# Altium PCB ADC_broad.PcbDoc
Units mil, origin at the board's own origin, x right, y up, seen from the top; angles counter-clockwise.
Board outline 6000 x 4000 mil, 2 copper layers (Top Layer, Bottom Layer); 79 components, 81 nets, 290 pads, 27 vias.
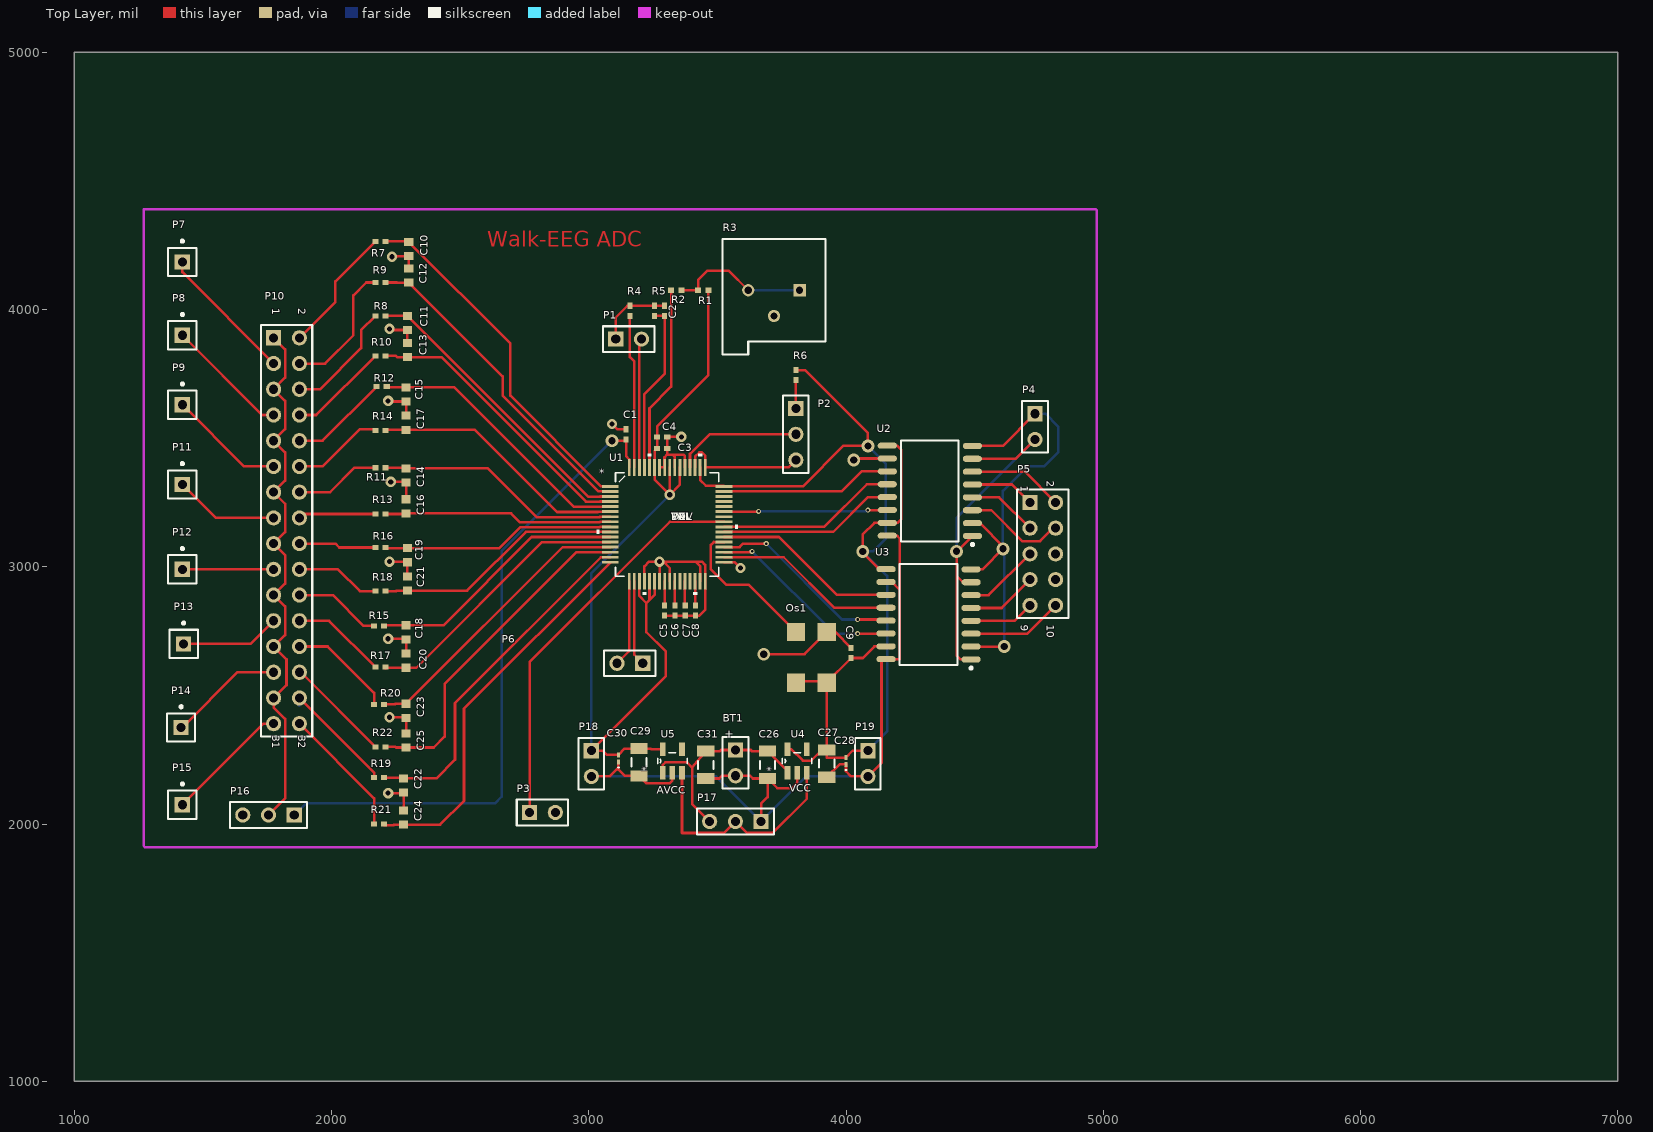
[diagram p0: Top Layer view]
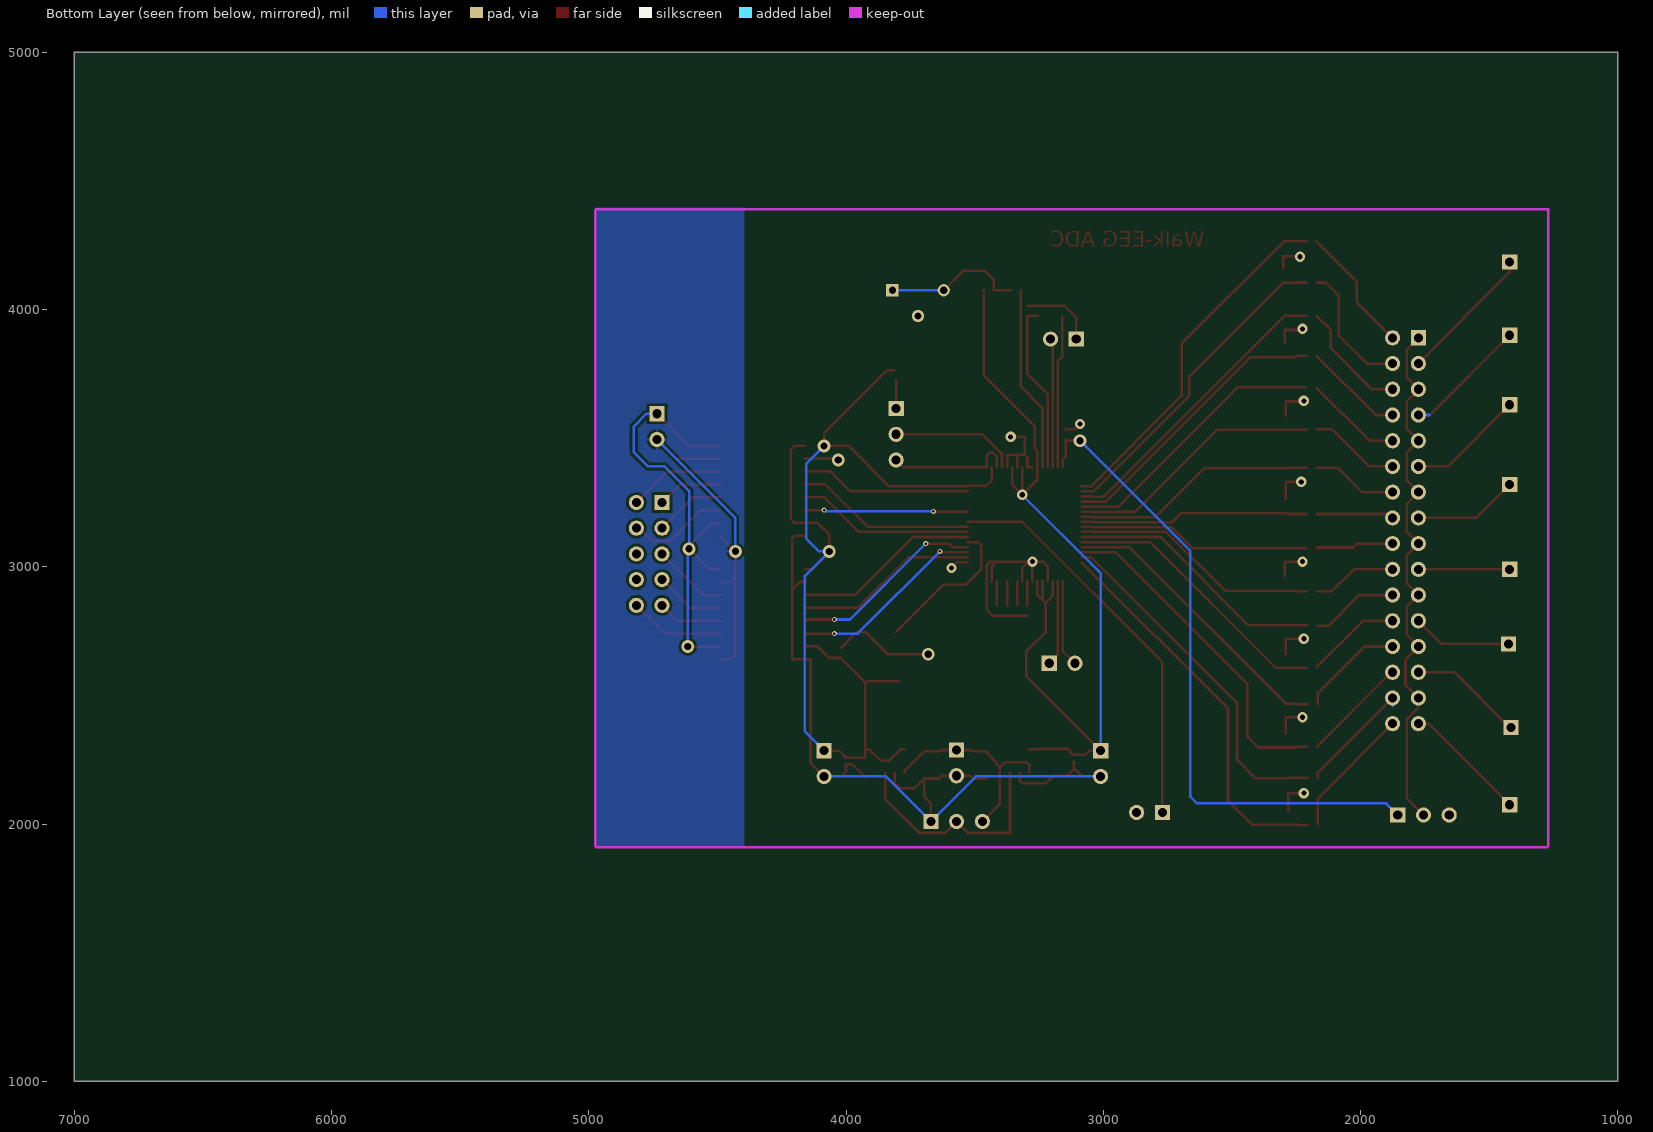
[diagram p1: Bottom Layer view, seen from below]

## Layer stack, top to bottom
Top Layer: signal copper 1.4
Dielectric: dielectric 12.6, FR-4, Dk 4.8
Bottom Layer: signal copper 1.4

## Board outline
1000,1000 7000,1000 7000,5000 1000,5000

## Design rules (kind name [scope] priority, off if disabled: settings)
Clearance [All] p1: gap=10
PolygonConnect [All] p1: connectstyle=Relief reliefconductorwidth=10 reliefentries=4 polygonreliefangle="90 Angle" airgapwidth=10
RoutingVias [All] p1: holewidth=28 width=50 viastyle="Through Hole" minholewidth=28 minwidth=50 maxholewidth=28 maxwidth=50
SilkscreenOverComponentPads [All] p1: minsilkscreentomaskgap=10
SolderMaskExpansion [All] p1: expansion=4
Width [All] p1: maxlimit=10 minlimit=10 preferedwidth=10
27 further rules are at their usual default settings.

## Classes and differential pairs
component class PW: BT1 C26 C27 C28 C29 C30 C31 P17 P18 P19 U4 U5
component class On_board_front_end: C10 C11 C12 C13 C14 C15 C16 C17 C18 C19 C20 C21 C22 C23 C24 C25 P7 P8 P9 P10 P11 P12 P13 P14 P15 P16 R7 R8 R9 R10 R11 R12 R13 R14 R15 R16 R17 R18 R19 R20 R21 R22
component class isolation: P4 P5 P6 U2
component class ADC: C1 C2 C3 C4 C5 C6 C7 C8 C9 Os1 P1 P2 P3 R1 R2 R3 R4 R5 R6 U1

## Components (designator, comment, footprint, x,y, rotation, side; value= is the part's Value field where it differs from the comment)
BT1 "Battery" BAT-2 3570.63,2237.56 r270 top
C1 "Cap" 0402 3145,3515 r270 top
C2 "" 0402 3295,3995 r270 top
C3 "Cap" 0402 3285.31,3460 r0 top
C4 "Cap" 0402 3285.31,3505 r0 top
C5 "Cap" 0402 3295,2830 r270 top
C6 "Cap" 0402 3335,2830 r270 top
C7 "Cap" 0402 3375,2830 r270 top
C8 "Cap" 0402 3415,2830 r270 top
C9 "Cap" 0402 4020,2665 r90 top
C10 "Cap" 1608[0603] 2300,4235 r270 top
C11 "Cap" 1608[0603] 2295,3947.87 r270 top
C12 "Cap" 1608[0603] 2300,4132.44 r270 top
C13 "Cap" 1608[0603] 2295,3842.87 r270 top
C14 "Cap" 1608[0603] 2290,3355 r270 top
C15 "Cap" 1608[0603] 2290,3670 r270 top
C16 "Cap" 1608[0603] 2290,3235 r270 top
C17 "Cap" 1608[0603] 2290,3560 r270 top
C18 "Cap" 1608[0603] 2290,2745 r270 top
C19 "Cap" 1608[0603] 2295,3045 r270 top
C20 "Cap" 1608[0603] 2290,2635 r270 top
C21 "Cap" 1608[0603] 2295,2935 r270 top
C22 "Cap" 1608[0603] 2280,2150 r270 top
C23 "Cap" 1608[0603] 2290,2440 r270 top
C24 "Cap" 1608[0603] 2280,2025 r270 top
C25 "Cap" 1608[0603] 2290,2325 r270 top
C26 "10u" C1206 3695,2230 r270 top
C27 "10u" C1206 3925,2235 r270 top
C28 "Cap" 0603 4000,2245 r90 top
C29 "10u" C1206 3195,2240 r270 top
C30 "Cap" 0603 3115,2255 r90 top
C31 "10u" C1206 3455,2230 r270 top
Os1 "FXO-HC73" PCBComponent_1 -24635,23320 r90 top
P1 "Header 2" HDR1X2 3105,3885 r0 top
P2 "Header 3" HDR1X3 3805,3615 r270 top
P3 "Header 2" HDR1X2 2770,2045 r0 top
P4 "Header 2" HDR1X2 4735,3595 r270 top
P5 "Header 5X2" HDR2X5 4715,3250 r270 top
P6 "Header 2" HDR1X2 3210,2625 r180 top
P7 "Plug" PIN1 1420,4185 r0 top
P8 "Plug" PIN1 1420,3900 r0 top
P9 "Plug" PIN1 1420,3630 r0 top
P10 "Header 16X2" HDR2X16 1775,3890 r270 top
P11 "Plug" PIN1 1420,3320 r0 top
P12 "Plug" PIN1 1420,2990 r0 top
P13 "Plug" PIN1 1425,2700 r0 top
P14 "Plug" PIN1 1415,2375 r0 top
P15 "Plug" PIN1 1420,2075 r0 top
P16 "Header 3" HDR1X3 1855,2035 r180 top
P17 "Header 3" HDR1X3 3670,2010 r180 top
P18 "Header 2" HDR1X2 3010,2285 r270 top
P19 "Header 2" HDR1X2 4085,2285 r270 top
R1 "" 0402 3445,4075 r0 top
R2 "" 0402 3340,4075 r180 top
R3 "Res Tap" VR4 3720,4025 r180 top
R4 "" 0402 3160,3995 r270 top
R5 "" 0402 3255,3995 r90 top
R6 "" 0402 3805,3745 r90 top
R7 "" 0402 2190,4265 r0 top
R8 "" 0402 2190,3975 r0 top
R9 "" 0402 2190,4105 r0 top
R10 "" 0402 2190,3820 r0 top
R11 "" 0402 2190,3385 r0 top
R12 "" 0402 2195,3700 r0 top
R13 "" 0402 2190,3205 r0 top
R14 "" 0402 2190,3530 r0 top
R15 "" 0402 2185,2770 r0 top
R16 "" 0402 2190,3075 r0 top
R17 "" 0402 2190,2610 r0 top
R18 "" 0402 2190,2905 r0 top
R19 "" 0402 2185,2180 r0 top
R20 "" 0402 2185,2465 r0 top
R21 "" 0402 2185,2000 r0 top
R22 "" 0402 2190,2300 r0 top
U1 "ADS1298_PAG_64" PAG64 3305,3165 r0 top
U2 "ADUM1401" SOIC_W 4190,3065 r180 top
U3 "ADUM1402" SOIC_W 4185,2585 r180 top
U4 "ADP151AUJZ-1.5-R" UJ_5 3810,2245 r90 top
U5 "ADP151AUJZ-1.5-R" UJ_5 3325,2245 r90 top

## Footprints (in the part's own frame and the unit in brackets; to place one, negate y for a bottom-side part, rotate by r counter-clockwise, add the part's x,y. Pads: shape width x height; smd on the part's side, far side on the other; paste and mask are expansions set on the pad)
0402 [mm] "Chip Capacitor, Body 1.0x0.5mm, IPC High Density"
  rect 0.6x0.5 smd: 1(-0.5,0) 2(0.5,0)
  body extent -0.55,-0.3 0.55,0.3, height 1.3
0603 [mm] "Chip Inductor, Body 0.6x0.3mm, IPC High Density"
  rect 0.5x0.3 smd: 1(-0.35,0) 2(0.35,0)
  silkscreen extent -0.9,-0.05 -0.9,0.05, body extent -0.33,-0.18 0.33,0.18, height 0.55
1608[0603] [mm] "Chip Capacitor, Body 1.6x0.8mm, IPC High Density"
  rect 0.8x0.9 smd: 1(-0.7,0) 2(0.7,0)
  body extent -0.87,-0.48 0.87,0.48, height 1.3
BAT-2 [mm] "Battery; 2 Leads"
  rect 1.5x1.5 hole 0.9: 1(-1.27,0)
  round 1.5 hole 0.9: 2(1.27,0)
  silkscreen extent -2.54,-1.27 2.54,1.27
C1206 [mm] "Chip Capacitor, Body 3.2x1.6mm, IPC High Density"
  rect 1.1x1.7 smd: 1(-1.35,0) 2(1.35,0)
  silkscreen extent -0.4,-0.75 0.4,0.75, body extent -1.7,-0.9 1.7,0.9, height 1.3
HDR1X2 [mm] "Connector; Header; 2 Position"
  rect 1.5x1.5 hole 0.9: 1(0,0)
  round 1.5 hole 0.9: 2(2.54,0)
  silkscreen extent -1.27,-1.27 3.81,1.27
HDR1X3 [mm] "Connector; Header; 3 Position"
  rect 1.5x1.5 hole 0.9: 1(0,0)
  round 1.5 hole 0.9: 2(2.54,0) 3(5.08,0)
  silkscreen extent -1.27,-1.27 6.35,1.27
HDR2X5 [mm] "Connector; Header; 5x2 Position"
  rect 1.5x1.5 hole 0.9: 1(0,0)
  round 1.5 hole 0.9: 2(0,2.54) 3(2.54,0) 4(2.54,2.54) 5(5.08,0) 6(5.08,2.54) 7(7.62,0) 8(7.62,2.54) 9(10.16,0) 10(10.16,2.54)
  silkscreen extent -1.27,-1.27 11.43,3.81
HDR2X16 [mm] "Connector; Header; 16x2 Position"
  rect 1.5x1.5 hole 0.9: 1(0,0)
  round 1.5 hole 0.9: 2(0,2.54) 3(2.54,0) 4(2.54,2.54) 5(5.08,0) 6(5.08,2.54) 7(7.62,0) 8(7.62,2.54) 9(10.16,0) 10(10.16,2.54) 11(12.7,0) 12(12.7,2.54) 13(15.24,0) 14(15.24,2.54) 15(17.78,0) 16(17.78,2.54) 17(20.32,0) 18(20.32,2.54) 19(22.86,0) 20(22.86,2.54) 21(25.4,0) 22(25.4,2.54) 23(27.94,0) 24(27.94,2.54) 25(30.48,0) 26(30.48,2.54) 27(33.02,0) 28(33.02,2.54) 29(35.56,0) 30(35.56,2.54) 31(38.1,0) 32(38.1,2.54)
  silkscreen extent -1.27,-1.27 39.37,3.81
PAG64 [mil]
  rect 65.5x11 smd: 1(-221.25,147.64) 2(-221.25,127.95) 3(-221.25,108.27) 4(-221.25,88.58) 5(-221.25,68.9) 6(-221.25,49.21) 7(-221.25,29.53) 8(-221.25,9.84) 9(-221.25,-9.84) 10(-221.25,-29.53) 11(-221.25,-49.21) 12(-221.25,-68.9) 13(-221.25,-88.58) 14(-221.25,-108.27) 15(-221.25,-127.95) 16(-221.25,-147.64) 33(221.25,-147.64) 34(221.25,-127.95) 35(221.25,-108.27) 36(221.25,-88.58) 37(221.25,-68.9) 38(221.25,-49.21) 39(221.25,-29.53) 40(221.25,-9.84) 41(221.25,9.84) 42(221.25,29.53) 43(221.25,49.21) 44(221.25,68.9) 45(221.25,88.58) 46(221.25,108.27) 47(221.25,127.95) 48(221.25,147.64)
  rect 11x65.5 smd: 17(-147.64,-221.25) 18(-127.95,-221.25) 19(-108.27,-221.25) 20(-88.58,-221.25) 21(-68.9,-221.25) 22(-49.21,-221.25) 23(-29.53,-221.25) 24(-9.84,-221.25) 25(9.84,-221.25) 26(29.53,-221.25) 27(49.21,-221.25) 28(68.9,-221.25) 29(88.58,-221.25) 30(108.27,-221.25) 31(127.95,-221.25) 32(147.64,-221.25) 49(147.64,221.25) 50(127.95,221.25) 51(108.27,221.25) 52(88.58,221.25) 53(68.9,221.25) 54(49.21,221.25) 55(29.53,221.25) 56(9.84,221.25) 57(-9.84,221.25) 58(-29.53,221.25) 59(-49.21,221.25) 60(-68.9,221.25) 61(-88.58,221.25) 62(-108.27,221.25) 63(-127.95,221.25) 64(-147.64,221.25)
  silkscreen extent -274,-274 274,274
PCBComponent_1 [mm]
  rect 1.8x1.8 smd: 1(-527.575,-725.425) 2(-522.575,-725.425) 3(-522.575,-722.4) 4(-527.575,-722.4)
PIN1 [mm] "Connector; Plug"
  rect 1.5x1.5 hole 0.9: 1(0,0)
  silkscreen extent -1.4,-1.4 1.4,2.17
SOIC_W [mm]
  oval 1.9x0.6 smd: 1(-7.654,-1.391) 2(-7.654,-2.661) 3(-7.654,-3.931) 4(-7.654,-5.201) 5(-7.654,-6.471) 6(-7.654,-7.741) 7(-7.654,-9.011) 8(-7.654,-10.281) 9(0.746,-10.306) 10(0.746,-9.036) 11(0.746,-7.766) 12(0.746,-6.496) 13(0.746,-5.226) 14(0.746,-3.956) 15(0.746,-2.686) 16(0.746,-1.416)
  silkscreen extent -7.78,-10.84 -0.6,-0.42, body extent -5.35,-10.85 -1.35,-0.85, height 1.91
UJ_5 [mil]
  rect 52x22 smd: 1(-46,37.4) 2(-46,0) 3(-46,-37.4) 4(46,-37.4) 5(46,37.4)
  silkscreen extent -10,-57 32,57
VR4 [mm] "Thru-Hole; 3 Leads"
  rect 1.2x1.2 hole 0.7: 1(-2.54,-1.27)
  round 1.2 hole 0.7: 2(0,1.27) 3(2.54,-1.27)
  silkscreen extent -5.08,-6.35 5.08,5.08

## Part data
BT1: "Multicell Battery"
C1 C3 C4 C5 C6 C7 C8 C9 C10 C11 C12 C13 C14 C15 C16 C17 C18 C19 C20 C21 C22 C23 C24 C25 C28 C30: "Capacitor"
C2: library part "Cap Semi", "Capacitor (Semiconductor SIM Model)"
C26 C27 C29 C31: library part "CAPACITOR POL", "Capacitor"
P1 P3 P4 P6 P18 P19: "Header, 2-Pin"
P2 P16 P17: "Header, 3-Pin"
P5: "Header, 5-Pin, Dual row"
P10: "Header, 16-Pin, Dual row"
R1 R2 R4 R5 R6 R7 R8 R9 R10 R11 R12 R13 R14 R15 R16 R17 R18 R19 R20 R21 R22: library part Res3, "Resistor"
R3: "Tapped Resistor"
U1 U4 U5: "Imported"
U2: "ADI isolation"

## Via types
v1: diameter 40, hole 20, Top Layer to Bottom Layer, 13 vias
v2: diameter 50, hole 28, Top Layer to Bottom Layer, 8 vias
v3: diameter 20, hole 10, Top Layer to Bottom Layer, 6 vias

## Nets (pads, with @x,y where several pads share a name; then routed paths per layer and width w, separated by ;. In a path a pad name is that pad's centre, name@x,y a point inside that pad or via, vN(x,y) a via of type N, cw(c..) or ccw(c..) an arc to the next point about the centre after c; other vN are vias at no path point)
AGND: BT1.2 C1.1 C3.2 C4.2 C5.2 C6.2 C7.2 C8.2 C9.2 C10.2 C11.2 C12.1 C13.1 C14.2 C15.2 C16.1 C17.1 C18.2 C19.2 C20.1 C21.1 C22.2 C23.2 C24.1 C25.1 C26.2 C27.2 C28.1 C29.2 C30.1 C31.2 Os1.2 P2.3 P3.2 P16.3 P17.1 P18.2 P19.2 R3.2 U1.20 U1.23 U1.25 U1.31 U1.32 U1.33 U1.49 U1.51 U1.53 U1.55 U1.57 U1.58 U2.10 U2.16 U3.10 U3.16 U4.2 U5.2 | length 7013.4
  Top Layer w10: v1(2220,2120) 2277.56,2120 C22.2 C24.1 ; v1(2220,2720) 2287.44,2720 C18.2 C20.1 ; v1(2220,3645) 2222.56,3642.44 C15.2 C17.1 ; v1(2225,2415) 2287.44,2415 C23.2 C25.1 ; v1(2225,3020) 2292.44,3020 C19.2 C21.1 ; v1(2230,3330) 2287.44,3330 C14.2 C16.1 ; v1@2235,3920.31 C11.2 C13.1 ; v1(2235,4205) 2252.56,4205 2255,4207.44 C10.2 C12.1 ; P18.2 3080,2185 3115,2220 ; v1(3090,3555) 3110.31,3534.69 C1.1 ; C30.1 3115,2220 ; U1.20 3216.42,3001.42 3235,3020 v1@3280,3020 ; U1.23 3275.47,2983.53 3275.47,3015.47 v1@3280,3020 ; U1.58@3276.29,3386.25 3294.34,3386.25 3294.34,3425.21 3305,3435.87 ; C5.2 C6.2 C7.2 C8.2 3430.31,2810.31 3452.64,2832.64 U1.32 3452.64,3007.36 3440,3020 3415,3020 ; U1.25 3314.84,2984.84 3314.84,2994.84 v1@3289.69,3020 ; U5.2 3325,2170 3313,2158 3223.85,2158 C29.2 3140,2186.85 3115,2211.85 3115,2220 ; U1.55 3334.53,3414.53 3334.53,3426.03 3324.68,3435.87 ; v1(3360,3505) C4.2 C3.2 3305,3435.87 ; U1.53 3373.9,3426.03 3373.9,3431.1 3369.13,3435.87 3324.68,3435.87 ; U1.51 3413.27,3428.27 3430,3445 3440,3445 3453.45,3431.55 3453.45,3386.25 3776.25,3386.25 P2.3 ; U1.31@3433.77,2943.75 3433.77,3001.23 3415,3020 ; C31.2 3507,2176.85 3517.71,2187.56 BT1.2 3627,2187.56 3637.71,2176.85 C26.2 ; U1.33 3567.64,3017.36 v1(3590,2995) ; P17.1 3670,2080 3695,2105 C26.2 ; v2(3680,2660) 3838.86,2660 Os1.2 3958.5,2746.18 C9.2 ; U4.2 3810,2160 3789,2139 3733.15,2139 3695.3,2176.85 C26.2 ; C27.2 3975.15,2232 4000,2232 C28.1 4000,2205 4020,2185 P19.2 4138,2238 4138,2640.75 U3.16 4209,2640.75 4209,2910 ; v2(4030,3415) 4035.75,3420.75 U2.10 ; U3.10 4178.25,2940.75 4209,2910 ; U2.16 4198.25,3120.75 4209,3110 4209,2910 ; v1@3280,3020 v1@3289.69,3020 ; v1@3289.69,3020 3415,3020 ; 3305,3435.87 3324.68,3435.87
  Bottom Layer w10: P18.2 3495,2185 P17.1 3845,2185 P19.2
  other v1: 3275,3020 2225,3925
AVCC: C3.1 C4.1 C29.1 C30.2 P18.1 R1.2 U1.19 U1.21 U1.22 U1.54 U1.56 U1.59 U5.5 | length 3546.8
  Top Layer w10: U1.19 3196.73,2886.73 3223.46,2860 ; U1.21 3236.1,2871.1 ; U1.22 3255.79,2890.79 3236.1,2871.1 ; U5.5 3242.15,2291 3240,2293.15 C29.1 3139.37,2293.15 C30.2 3070.22,2268.78 3054,2285 P18.1 3300,2575 3300,2670 3223.46,2746.54 3223.46,2860 ; U1.56 3314.84,3346.47 3314.84,3339.84 3315,3339.69 v1(3315,3280) ; U1.54 3354.21,3319.21 v1(3315,3280) ; R1.2 3464.69,3744.69 3265.63,3545.63 C4.1 C3.1 3255.79,3450.16 U1.59 3255.79,3339.21 3310,3285 3310,3280 v1(3315,3280) ; 3223.46,2860 3225,2860 3236.1,2871.1
  Bottom Layer w10: P18.1 3010,2975 v1(3315,3280)
CLKSEL: P2.2 U1.52 | length 495.4
  Top Layer w10: U1.52 3393.58,3438.58 3470,3515 P2.2
DAISY_IN: P3.1 U1.41 | length 1566.9
  Top Layer w10: P3.1 2770,2630 3314.84,3174.84 U1.41
IN1N: C22.1 R19.2 U1.15 | length 1361.5
  Top Layer w10: R19.2 C22.1@2277.56,2180 ; C22.1 2407.56,2177.56 2480,2250 2480,2470 3047.05,3037.05 U1.15
IN1P: C24.2 R21.2 U1.16 | length 1512.6
  Top Layer w10: R21.2@2204.69,1995 2241,1995 2243.44,1997.44 C24.2 2422.44,1997.44 2515,2090 2515,2448.61 U1.16
IN2N: C23.1 R20.2 U1.13 | length 1132.3
  Top Layer w10: R20.2 2246,2465 2248.56,2467.56 C23.1 2898.86,3076.42 U1.13
IN2P: C25.2 R22.2 U1.14 | length 1309.7
  Top Layer w10: R22.2 2248,2300 2250.56,2297.44 C25.2 2397.44,2297.44 2440,2340 2440,2545 2951.73,3056.73 U1.14
IN3N: C18.1 R15.2 U1.11 | length 1018.8
  Top Layer w10: R15.2@2207.13,2772.56 C18.1 2435,2772.56 2778.23,3115.79 U1.11
IN3P: C20.2 R17.2 U1.12 | length 1077.5
  Top Layer w10: R17.2@2209.69,2605 2212.13,2607.44 C20.2 2330,2607.44 2818.66,3096.1 U1.12
IN4N: C19.1 R16.2 U1.9 | length 905.7
  Top Layer w10: R16.2@2212.25,3072.56 C19.1 2652.56,3072.56 2732.95,3152.95 3041.77,3152.95 3043.97,3155.16 U1.9
IN4P: C21.2 R18.2 U1.10 | length 969.5
  Top Layer w10: R18.2 2251,2905 2253.44,2907.44 C21.2 2527.44,2907.44 2755.47,3135.47 U1.10
IN5N: C14.1 R11.2 U1.7 | length 955.7
  Top Layer w10: R11.2 2278.85,3385 2278.85,3382.56 C14.1 2607.44,3382.56 2797.05,3192.95 3042.4,3192.95 3043.97,3194.53 U1.7
IN5P: C16.2 R13.2 U1.8 | length 890.1
  Top Layer w10: R13.2 2287.56,3205 C16.2 2697.56,3207.44 2732.05,3172.95 3042.08,3172.95 3043.97,3174.84 U1.8
IN6N: C15.1 R12.2 U1.5 | length 1061.9
  Top Layer w10: R12.2@2214.69,3697.56 C15.1 2477.44,3697.56 2942.05,3232.95 3043.03,3232.95 3043.97,3233.9 U1.5
IN6P: C17.2 R14.2 U1.6 | length 1008
  Top Layer w10: R14.2@2209.69,3535 2212.25,3532.44 C17.2 2557.56,3532.44 2877.05,3212.95 3035,3212.95 3036.26,3214.21 U1.6
IN7N: C11.1 R8.2 U1.3 | length 1165.4
  Top Layer w10: R8.2 2294.57,3975 C11.1 2997.48,3272.95 3043.66,3272.95 3043.97,3273.27 U1.3
IN7P: C13.2 R10.2 U1.4 | length 1109.2
  Top Layer w10: R10.2 2250,3820 2254.69,3815.31 C13.2 2426.84,3815.31 2989.2,3252.95 3043.34,3252.95 3043.97,3253.58 U1.4
IN8N: C10.1 R7.2 U1.1 | length 1381
  Top Layer w10: R7.2 C10.1@2295,4265 ; C10.1 2695,3867.56 2695,3665.28 3047.64,3312.64 U1.1
IN8P: C12.2 R9.2 U1.2 | length 1254.3
  Top Layer w10: R9.2 2254,4105 2254.12,4104.88 C12.2 2665,3739.88 2665,3665 3037.05,3292.95 3043.97,3292.95 U1.2
IN_SPI_CS: P5.1 U2.5 | length 252.6
  Top Layer w10: U2.5 4645.24,3319.76 P5.1
IN_SPI_DIN: P5.9 U3.4 | length 253.6
  Top Layer w10: U3.4 4654.76,2789.76 P5.9
IN_SPI_DRDY: P5.4 U2.3 | length 394
  Top Layer w10: U2.3 4565.24,3219.76 4685,3100 4755,3100 4805,3150 P5.4
IN_SPI_SCLK: P5.3 U2.4 | length 273.3
  Top Layer w10: U2.4 4595.24,3269.76 P5.3
IN_SPI_START: P5.10 U3.3 | length 374.3
  Top Layer w10: U3.3 4704.76,2739.76 P5.10
NetBT1_1: BT1.1 C26.1 C31.1 P17.3 U4.1 U5.1 | length 838.4
  Top Layer w10: U5.1 3287.6,2230 3297.6,2240 3382,2240 3402,2220 ; P17.3 3402,2078 3402,2220 ; U4.1 3772.6,2205.55 C26.1 3634.41,2283.15 3630,2287.56 BT1.1 3514.41,2287.56 3510,2283.15 C31.1 3402,2220
NetC2_1: C2.1 P1.1 R4.1 R5.2 | length 293.5
  Top Layer w10: P1.1 3105,3970 3149.69,4014.69 R4.1 R5.2 C2.1
NetC5_1: C5.1 U1.24 | length 98
  Top Layer w10: C5.1 3295,2900 ; 3295.16,2903.81 3295.16,2900.16 3295,2900 ; U1.24 3295.16,2903.97 3295,2903.81 3295,2900
NetC6_1: C6.1 U1.26 | length 98.4
  Top Layer w10: U1.26 3334.53,2903.97 ; C6.1 3335,2900 ; 3334.53,2903.97 3334.53,2900.47 3335,2900 ; 3334.53,2903.97 3335,2903.5 3335,2900
NetC7_1: C7.1 U1.28 | length 94.5
  Top Layer w10: U1.28 3373.9,2850.79 C7.1
NetC8_1: C8.1 U1.30 | length 94.8
  Top Layer w10: U1.30 3413.27,2851.42 C8.1
NetOs1_3: Os1.3 U1.37 | length 582.9
  Top Layer w10: U1.37 3486.47,3096.1 3486.29,3096.29 3475,3085 3475,2990 3535,2930 3622.13,2930 Os1.3
NetP2_1: P2.1 R6.1 | length 110.3
  Top Layer w10: P2.1 3805,3665 R6.1
NetP4_1: P4.1 U2.2 U2.8 U3.2 U3.8 | length 1846.2
  Top Layer w10: U3.2 v2(4615,2689.76) ; U3.8 4529.76,2989.76 4615,3075 4520.24,3169.76 U2.2 ; U2.8 4609.76,3469.76 P4.1
  Bottom Layer w10: v2(4615,2689.76) 4615,3064.76 v2(4610,3069.76) 4610,3295 4705,3390 4770,3390 4825,3445 4825,3545 4775,3595 P4.1
NetP4_2: P4.2 U2.1 U2.7 U3.1 U3.7 | length 1456.7
  Top Layer w10: U3.1 4445.24,2639.76 4430,2655 4430,2965 ; U3.7 4455.24,2939.76 4430,2965 ; U2.1 4431.57,3060 v2(4430,3060) 4430,2965 ; U2.7 4659.76,3419.76 P4.2
  Bottom Layer w10: v2(4430,3060) 4430,3190 P4.2
NetP7_1: P7.1 P10.3 | length 542
  Top Layer w10: P7.1 1420,4145 P10.3
NetP8_1: P8.1 P10.7 | length 528.4
  Top Layer w10: P8.1 1730,3590 P10.7
  Bottom Layer w10: 1730,3590 P10.7
NetP9_1: P9.1 P10.11 | length 454.4
  Top Layer w10: P9.1 1660,3390 P10.11
NetP10_1: P10.1 P10.5 P10.9 P10.13 P10.17 P10.21 P10.25 P10.29 P16.2 | length 2164.9
  Top Layer w10: P16.2 1819.53,2099.53 1819.53,2408.44 1775,2452.97 P10.29 1825,2540 1825,2640 P10.25 1819.53,2734.53 1819.53,2845.47 P10.21 1820,2935 1820,3045 P10.17 1820,3135 1820,3245 P10.13 1820,3335 1820,3445 P10.9 1820,3535 1820,3645 P10.5 1820,3735 1820,3845 P10.1
NetP10_2: P10.2 R7.1 | length 497.3
  Top Layer w10: P10.2 2015,4030 2015,4109.68 R7.1
NetP10_4: P10.4 R9.1 | length 516.6
  Top Layer w10: P10.4 1975,3790 2085,3900 2085,4055 2135,4105 R9.1
NetP10_6: P10.6 R8.1 | length 454.2
  Top Layer w10: P10.6 1955,3690 2115,3850 2115,3919.68 R8.1
NetP10_8: P10.8 R10.1 | length 390.6
  Top Layer w10: P10.8 1940.32,3590 R10.1
NetP10_10: P10.10 R12.1 | length 380.2
  Top Layer w10: P10.10 1965.32,3490 R12.1@2170.32,3695
NetP10_12: P10.12 R14.1 | length 355.4
  Top Layer w10: P10.12 1965,3390 2110,3535 R14.1@2170.32,3535
NetP10_14: P10.14 R11.1 | length 334.7
  Top Layer w10: P10.14 1995,3290 2090,3385 R11.1
NetP10_15: P10.15 P11.1 | length 408.8
  Top Layer w10: P11.1 1550,3190 P10.15
NetP10_16: P10.16 R13.1 | length 301.5
  Top Layer w10: P10.16 1890,3205 R13.1
NetP10_18: P10.18 R16.1 | length 301.5
  Top Layer w10: P10.18 2015,3090 2030,3075 R16.1
NetP10_19: P10.19 P12.1 | length 355
  Top Layer w10: P12.1 P10.19
NetP10_20: P10.20 R18.1 | length 330.5
  Top Layer w10: P10.20 2025,2990 2110,2905 R18.1
NetP10_22: P10.22 R15.1 | length 340
  Top Layer w10: P10.22 2005,2890 2125,2770 R15.1
NetP10_23: P10.23 P13.1 | length 387.3
  Top Layer w10: P13.1 1685,2700 P10.23
NetP10_24: P10.24 R17.1 | length 369.9
  Top Layer w10: P10.24 1990.32,2790 R17.1
NetP10_26: P10.26 R20.1 | length 409.7
  Top Layer w10: P10.26 1985,2690 2165.32,2509.68 R20.1
NetP10_27: P10.27 P14.1 | length 449.1
  Top Layer w10: P14.1 1420,2375 1635,2590 P10.27
NetP10_28: P10.28 R22.1 | length 415.4
  Top Layer w10: P10.28 1880.32,2590 R22.1
NetP10_30: P10.30 R19.1 | length 461.3
  Top Layer w10: P10.30 2165.32,2199.68 R19.1
  Bottom Layer w10: 1875,2459 P10.30
NetP10_31: P10.31 P15.1 | length 485.5
  Top Layer w10: P15.1 1735,2390 P10.31
NetP10_32: P10.32 R21.1 | length 510.3
  Top Layer w10: P10.32 2165.32,2099.68 R21.1
NetP17_2: P17.2 U4.3 U5.3 | length 912.4
  Top Layer w10: U5.3 3362.4,1965.6 3363,1965 3525,1965 P17.2 3615,1965 3715,1965 3847.4,2097.4 U4.3
NetR1_1: R1.1 R2.1 R3.1 R3.3 | length 546.1
  Top Layer w10: R2.1 R1.1 3425.32,4115.32 3460,4150 3545,4150 R3.3
  Bottom Layer w10: R3.3 R3.1
OUT_P\W\D\N: P5.5 U3.6 | length 295
  Top Layer w10: U3.6 4554.76,2889.76 P5.5
OUT_R\E\S\E\T\: P5.7 U3.5 | length 274.3
  Top Layer w10: U3.5 4604.76,2839.76 P5.7
OUT_SPI_DOUT: P5.2 U2.6 | length 373.3
  Top Layer w10: U2.6 4695.24,3369.76 P5.2
P\W\D\N: U1.35 U3.14 | length 774.8
  Top Layer w10: U1.35 3631.73,3056.73 v3(3635,3060) 3627.95,3060 3625,3057.05 ; v3(4045,2740) 4154.88,2740 U3.14
  Bottom Layer w10: v3(3635,3060) 3955,2740 v3(4045,2740)
PACE1: P6.2 U1.17 | length 338.4
  Top Layer w10: P6.2 3157.36,2672.36 U1.17
PACE2: P6.1 U1.18 | length 332.4
  Top Layer w10: U1.18 3177.05,2657.95 P6.1
R\E\S\E\T\: U1.36 U3.13 | length 759
  Top Layer w10: U1.36 3586.42,3076.42 3600,3090 v3(3690,3090) ; v3(4045,2795) 4151.38,2795 U3.13
  Bottom Layer w10: v3(3690,3090) 3985,2795 v3(4045,2795)
RLDIN: P1.2 U1.62 | length 502.2
  Top Layer w10: U1.62 3196.73,3876.73 P1.2
RLDINV: C2.2 R5.1 U1.61 | length 661.6
  Top Layer w10: U1.61 3216.42,3671.42 3295,3750 C2.2 3274,3975.31 R5.1
RLDOUT: R4.2 U1.63 | length 596.1
  Top Layer w10: R4.2 3160,3815 3177.05,3797.95 U1.63
RLDREF: R2.2 U1.60 | length 723.6
  Top Layer w10: U1.60 3236.1,3616.1 3320.31,3700.31 R2.2
SPI_CS: U1.39 U2.13 | length 690.4
  Top Layer w10: U1.39 3950.47,3135.47 4085.75,3270.75 U2.13
SPI_DIN: U1.34 U3.12 | length 712.8
  Top Layer w10: U1.34 3757.95,3037.05 3954.25,2840.75 4078,2840.75 4077.25,2840 4154.88,2840 U3.12
SPI_DOUT: U1.43 U2.14 | length 637.1
  Top Layer w10: U1.43 3659.21,3214.21 v3(3660,3215) ; v3(4085,3220) 4159.88,3220 U2.14
  Bottom Layer w10: v3(3660,3215) 4080,3215 v3(4085,3220)
SPI_DRDY: U1.47 U2.11 | length 666.6
  Top Layer w10: U1.47 3982.95,3292.95 4060.75,3370.75 U2.11
SPI_SCLK: U1.40 U2.12 | length 703
  Top Layer w10: U1.40 3915.16,3155.16 4080.75,3320.75 U2.12
SPI_START: U1.38 U3.11 | length 722.6
  Top Layer w10: U1.38 3566.03,3115.79 3739.21,3115.79 3964.25,2890.75 U3.11
VCC: C9.1 C27.1 C28.2 Os1.1 Os1.4 P19.1 R6.2 U1.48 U1.50 U2.9 U2.15 U3.9 U3.15 U4.5 | length 4292.7
  Top Layer w10: U1.50 3432.95,3337.05 3455,3315 U1.48@3524.7,3315 ; U1.48 3832.64,3312.64 3990.75,3470.75 4085,3470.75 4085,3520.75 3841.06,3764.69 3815,3764.69 ; U4.5 3787,2291 3832,2246 3864.85,2246 3907,2288.15 C27.1 ; Os1.4@3795.94,2554.33 Os1.1@3915.04,2554.33 ; P19.1 4026.22,2285 C28.2 4000,2258 3925,2258 C27.1 ; 4110,2690.75 4110.75,2690.75 ; U3.15 4110.75,2690.75 ; U3.9 4129.02,2990.75 4065,3054.76 v2(4065,3059.76) 4065,3125 4110.75,3170.75 U2.15 4200,3170.75 4214,3184.75 4214,3455 4198.25,3470.75 U2.9 ; C27.1 C27.1 Os1.1 4020,2644.29 C9.1 4065.32,2645.32 4110.75,2690.75
  Bottom Layer w10: P19.1 4160,2360 4160,2964.76 v2(4065,3059.76) 4104.76,3059.76 4155,3110 4155,3400 v2(4085,3470)
WCT: C1.2 P16.1 U1.64 | length 2568.5
  Top Layer w10: v2(3090,3490) 3139.69,3490 C1.2 3145,3430 3157.36,3417.64 U1.64
  Bottom Layer w10: P16.1 1900,2080 2635,2080 2661,2106 2661,3061 v2(3090,3490)
pads on no net: P5.6 P5.8 U1.27 U1.29 U1.42 U1.44 U1.45 U1.46 U4.4 U5.4

## Polygon pours and split planes (outlines as drawn)
NetP4_2 on Bottom Layer "Bottom Layer-No Net" (solid, pour order 16): 4395,4390 4395,1910 4965,1910 4975,1920 4975,4395 4395,4395

## Keep-outs
Keep-Out Layer:
  lines w10: 1270,1915 1270,4390 4970,4390 4975,4385 4975,1915 4970,1910 1275,1910 1270,1915

## Other copper
Top Layer:
  text "Walk-EEG ADC" at 2605,4245 h60

## Text inside footprints (layer, text, board x,y; h text height)
BT1: Top Overlay "+" at 3532.91,2367.05 h30 r270
P5: Top Overlay "10" at 4780,2775 h30 r270; Top Overlay "9" at 4680,2775 h30 r270; Top Overlay "1" at 4680,3315 h30 r270; Top Overlay "2" at 4780,3335 h30 r270
P10: Top Overlay "2" at 1870,4005 h30 r270; Top Overlay "1" at 1770,4005 h30 r270; Top Overlay "31" at 1770,2345 h30 r270; Top Overlay "32" at 1870,2345 h30 r270
U1: Top Overlay "TOL" at 3320,3180 h30; Top Overlay "VAL" at 3320,3180 h30; Top Overlay "DEV" at 3320,3180 h30; Top Overlay "PN" at 3320,3180 h30; Top Overlay "*" at 3041,3352.48 h30; Mechanical 1 "RefDes2" at 3320,3180 h30; Mechanical 1 "*" at 3041,3352.48 h30
U4: Top Overlay "VCC" at 3780,2115 h50; Top Overlay "*" at 3720.6,2204 h30 r90; Mechanical 1 "*" at 3720.6,2204 h30 r90
U5: Top Overlay "AVCC" at 3264.37,2117.44 h30; Top Overlay "*" at 3235.6,2204 h30 r90; Mechanical 1 "*" at 3235.6,2204 h30 r90